# EAGLE board chapr (EAGLE 6.4)
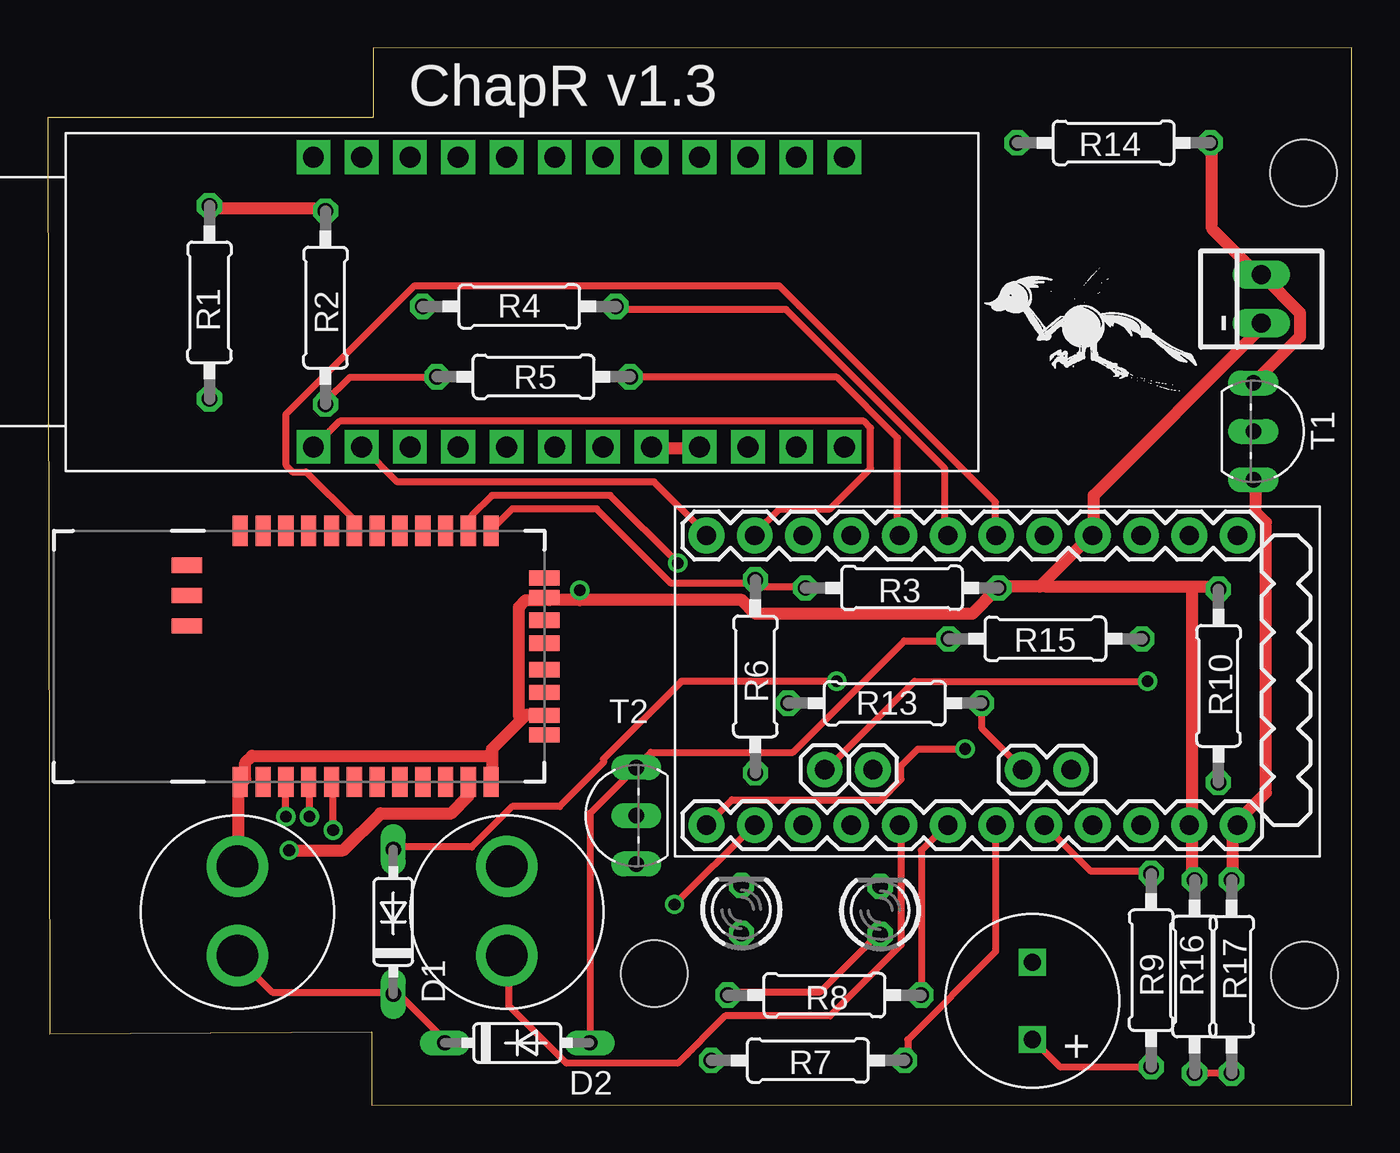
[diagram p0: board, top side]
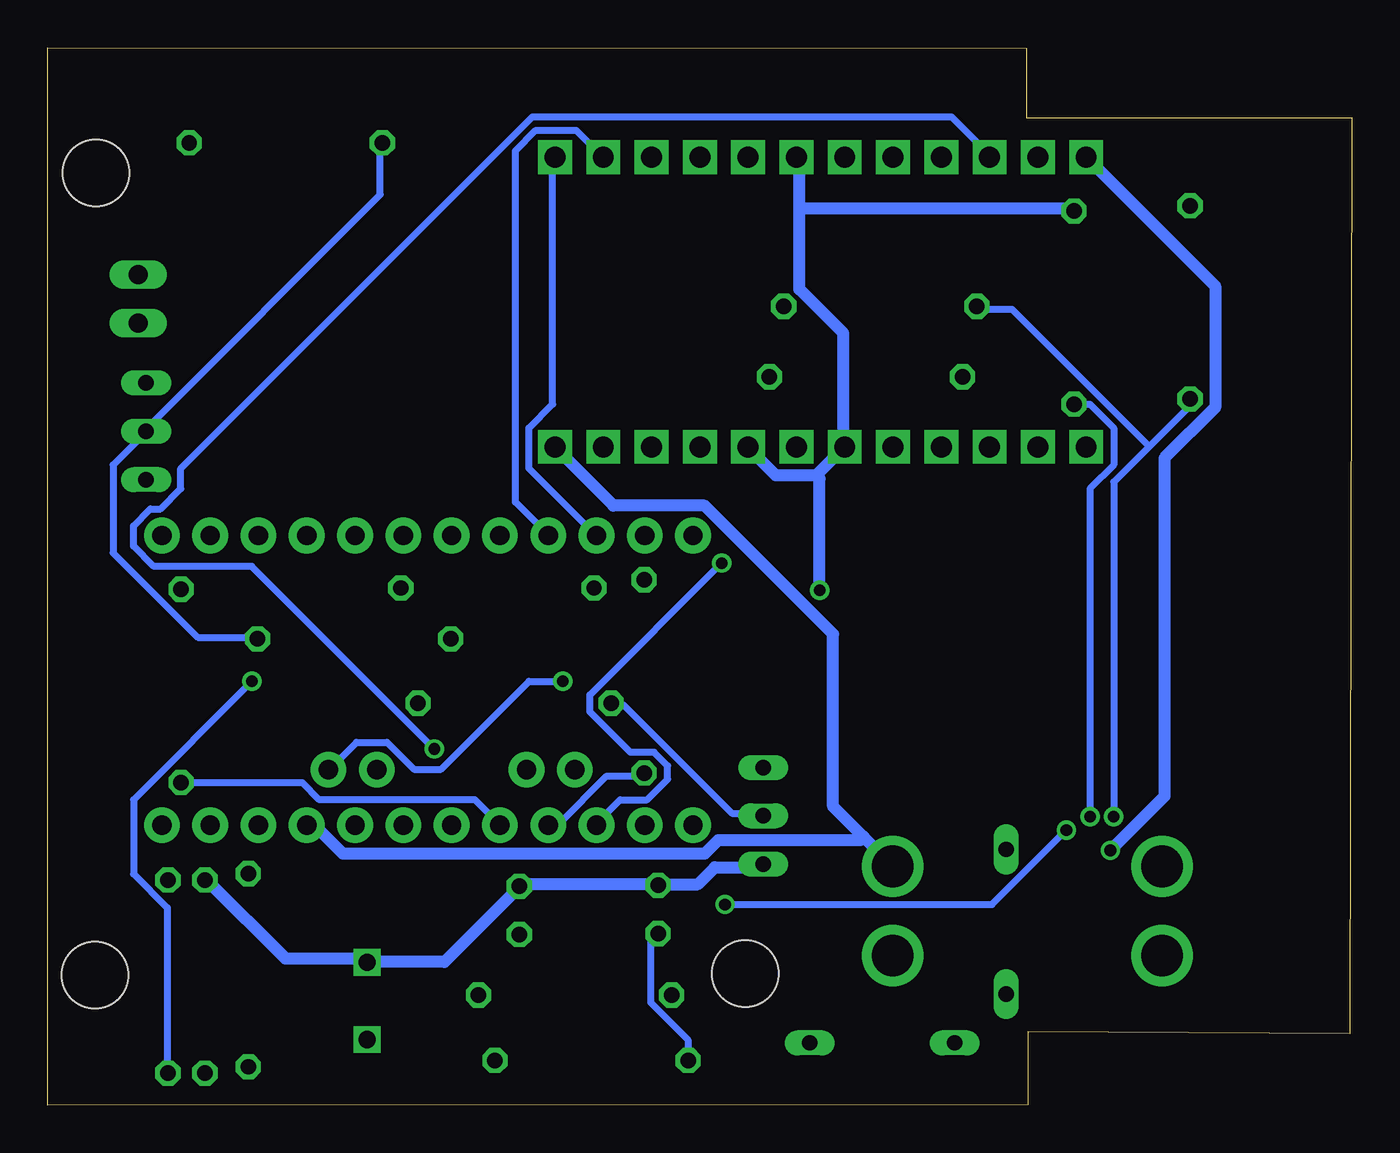
[diagram p1: board, bottom side, seen from below]

Size 68.61 x 55.65 mm. Coordinates in mm from the lower left corner, seen from the top.
Outline: 0.11,3.78 17.05,3.86 17.05,0.03 68.61,0 68.61,55.65 17.13,55.6 17.13,51.97 0,51.97 0.11,3.78
Copper layers (1*16): Top 0.035mm / dielectric 1.5mm / Bottom 0.035mm
Design rules "ChapRDesignRules": minimum track width 10mil, minimum drill 24mil, track to track 8mil, track to pad 8mil, pad to pad 8mil, via to via 9mil, smd to smd 9mil, copper to edge 40mil, drill to drill 8mil, minimum pad ring 10mil, minimum via ring 8mil, stop-mask expansion 4mil, vias tented up to drill 0mil, thermal gap 10mil
Net classes: 0 default: width 0.381 mm; 1 GND: width 0.635 mm; 2 Supply: width 0.635 mm; 3 Main Supply: width 0.635 mm
Holes 3.5 mm at 66.07,49.05 66.11,6.84 31.92,6.94
tRestrict: area 24.3,16 to 26.8,18.5; area -0.7,15.9 to 9.5,31.2; area 30,4.9 to 34,8.9; area 64.1,4.8 to 68.1,8.8; area 64.2,47.1 to 68.2,51.1; area 24.6,28.5 to 26.8,31.1
bRestrict: area 24.3,16 to 26.8,18.5; area -0.7,16 to 9.5,31.3; area 64,4.8 to 68.2,8.8; area 64.2,47.2 to 68.3,51.1; area 29.9,5 to 34,8.9
vRestrict: area 9.5,17.4 to 25.5,29.4

## Footprints (pad centres in the part's own frame; a part is rotated, then mirrored left to right if it is on the bottom)
22-23-2021 = drill 1 long: 1 -1.27,0; 2 1.27,0
PROMININOHEADER = drill 1.016 pad 1.88: A0 6.35,-5.08; A1 6.35,-2.54; A2 6.35,0; A3 6.35,2.54; A4 3.429,1.397; A5 3.429,3.937; A6 3.429,-9.017; A7 3.429,-6.477; D2 -8.89,2.54; D3 -8.89,0; D4 -8.89,-2.54; D5 -8.89,-5.08; D6 -8.89,-7.62; D7 -8.89,-10.16; D8 -8.89,-12.7; D9 -8.89,-15.24; D10 6.35,-15.24; D11 6.35,-12.7; D12 6.35,-10.16; D13 6.35,-7.62; GND -8.89,5.08; GND2 6.35,10.16; RAWV 6.35,12.7; RST -8.89,7.62; RST2 6.35,7.62; RXI -8.89,10.16; TXO -8.89,12.7; VCC 6.35,5.08
DO35-7 = drill 0.813 long: A 3.81,0; C -3.81,0
LED3MM = drill 0.813 octagon: A -1.27,0; K 1.27,0
RN41 = smd 0.8 x 1.6: 1 -6.6,-6.6; 2 -5.4,-6.6; 3 -4.2,-6.6; 4 -3,-6.6; 5 -1.8,-6.6; 6 -0.6,-6.6; 7 0.6,-6.6; 8 1.8,-6.6; 9 3,-6.6; 10 4.2,-6.6; 11 5.4,-6.6; 12 6.6,-6.6; 13 6.6,6.6; 14 5.4,6.6; 15 4.2,6.6; 16 3,6.6; 17 1.8,6.6; 18 0.6,6.6; 19 -0.6,6.6; 20 -1.8,6.6; 21 -3,6.6; 22 -4.2,6.6; 23 -5.4,6.6; 24 -6.6,6.6 | smd 1.6 x 0.8: 25 -9.4,4.8; 26 -9.4,3.2; 27 -9.4,1.6; 28 9.4,3.1; 29 9.4,-3.1; 30 9.4,-4.122; 31 9.4,-1.9; 32 9.4,-0.7; 33 9.4,0.7; 34 9.4,1.9; 35 9.4,4.122
2-PIN-PUSHBUTTON = drill 2.2 pad 3.048: P$1 -1.778,0; P$2 2.921,0
0207/10 = drill 0.813 octagon: 1 -5.08,0; 2 5.08,0
TO92-EBC = drill 0.813 long: B 0,-1.27; C 2.54,-1.27; E -2.54,-1.27
SPEAKER = drill 0.9 square: + -2.032,0; - 2.032,0
V2DIP2 = drill 1.1 pad 1.778 square: P$1 40.97,1.27; P$2 38.43,1.27; P$3 35.89,1.27; P$4 33.35,1.27; P$5 30.81,1.27; P$6 28.27,1.27; P$7 25.73,1.27; P$8 23.19,1.27; P$9 20.65,1.27; P$10 18.11,1.27; P$11 15.57,1.27; P$12 13.03,1.27; P$13 40.97,16.51; P$14 38.43,16.51; P$15 35.89,16.51; P$16 33.35,16.51; P$17 30.81,16.51; P$18 28.27,16.51; P$19 25.73,16.51; P$20 23.19,16.51; P$21 20.65,16.51; P$22 18.11,16.51; P$23 15.57,16.51; P$24 13.03,16.51

## Placement (x,y rotation side)
-  9v power  [22-23-2021]  63.84,42.42 90 top
ARDUINO  PROMININOHEADER  [PROMININOHEADER]  49.9,21.09 270 top
D1  1N4148  [DO35-7]  18.19,9.66 90 top
D2  1N4148  [DO35-7]  24.71,3.29 0 top
LED1  [LED3MM]  43.8,10.26 90 top
M2  RN42 Module  [RN41]  16.74,23.62 0 top
PB1  PUSHBUTTON  [2-PIN-PUSHBUTTON]  24.16,10.8 270 top
PB2  BUTTON  [2-PIN-PUSHBUTTON]  9.99,10.8 270 top
PWR-LED  [LED3MM]  36.5,10.31 90 top
R1  19.1k  [0207/10]  8.52,42.24 270 top
R2  19.1k  [0207/10]  14.62,41.97 270 top
R3  19.1k  [0207/10]  44.95,27.22 180 top
R4  10k  [0207/10]  24.81,42.03 0 top
R5  10k  [0207/10]  25.56,38.33 0 top
R6  10k  [0207/10]  37.23,22.57 270 top
R7  470  [0207/10]  40,2.37 0 top
R8  470  [0207/10]  40.86,5.8 0 top
R9  100  [0207/10]  58.06,7.11 90 top
R10  10k  [0207/10]  61.59,22.07 270 top
R13  10k  [0207/10]  44.05,21.16 0 top
R14  19.1k  [0207/10]  56.08,50.64 0 top
R15  1.5k  [0207/10]  52.49,24.54 180 top
R16  24K  [0207/10]  60.34,6.77 90 top
R17  24K  [0207/10]  62.28,6.77 270 top
T1  3906  [TO92-EBC]  64.7,35.46 270 top
T2  3904  [TO92-EBC]  29.7,15.24 90 top
U$2  SPEAKER  [SPEAKER]  51.8,5.5 90 top
V2DIP2  V2DIP2  [V2DIP2]  0.95,33.37 0 top

## Library data of the parts
- = con-molex; MF: MOLEX; MPN: 22-23-2021; OC_FARNELL: 1462926; OC_NEWARK: 25C3832
ARDUINO PB1 PB2 U$2 V2DIP2 = ChapR-Custom
D1 D2 = diode
LED1 PWR-LED = led
M2 = SparkFun-RF
R1-R10 R13-R17 = resistor
T1 T2 = transistor-neu-to92

## Nets
+3V3 [Supply]: M2.11 V2DIP2.P$24
+5V [Supply]: ARDUINO.VCC PB1.P$1 V2DIP2.P$1
+9V [Main Supply]: -.2 R14.2 T1.E
GND [GND]: -.1 ARDUINO.GND ARDUINO.GND2 LED1.K M2.1 M2.12 M2.28 M2.29 PB2.P$1 PWR-LED.K R1.1 R2.1 R3.1 R10.1 R16.2 T2.E U$2.- V2DIP2.P$4 V2DIP2.P$5 V2DIP2.P$7 V2DIP2.P$18
N$1: R14.1 R15.1 T1.B
N$2: ARDUINO.D10 V2DIP2.P$22
N$3: ARDUINO.D13 R6.2
N$4: ARDUINO.D12 M2.14
N$5: ARDUINO.D11 M2.5
N$6: M2.3 R1.2 R4.1
N$7: M2.4 R2.2 R5.1
N$8: ARDUINO.D5 R5.2
N$9: M2.13 R3.2 R6.1
N$10: ARDUINO.D6 V2DIP2.P$14
N$11: ARDUINO.D7 V2DIP2.P$13
N$12: ARDUINO.D8 V2DIP2.P$12
N$13: ARDUINO.D9 V2DIP2.P$11
N$14: ARDUINO.D4 R4.2
N$15: ARDUINO.D3 M2.19
N$16: PWR-LED.A R7.1
N$17: LED1.A R8.1
N$18: ARDUINO.A2 R7.2
N$19: R9.1 U$2.+
N$20: ARDUINO.A1 R8.2
N$21: ARDUINO.A3 R9.2
N$23 [Main Supply]: ARDUINO.RAWV R17.1 T1.C
N$24: ARDUINO.A0 PB1.P$2 R10.2
N$25: D2.A R15.2 T2.C
N$26: R13.1 T2.B
N$27: D1.C D2.C PB2.P$2
N$29: ARDUINO.A5 D1.A
N$30: ARDUINO.A4 R13.2
N$31: ARDUINO.A6 R16.1 R17.2

## Tracks (layer width: path | path; a pad name or v marks a point on that pad's centre or on a via)
+3V3  (via drill 0.61)
  Top 0.635: v12.71,13.42 15.55,13.42 17.51,15.37 21.24,15.37 22.13,16.26 22.13,16.97 M2.11
  Bottom 0.635: v12.71,13.42 9.87,16.26 9.87,34.04 7.2,36.71 7.2,43.11 13.95,49.86 V2DIP2.P$24
+5V
  Bottom 0.635: 25.69,14.13 24.27,12.7 PB1.P$1 | 25.69,14.13 27.29,15.73 27.29,24.79 34.05,31.55 38.85,31.55 41.87,34.57 V2DIP2.P$1 | ARDUINO.VCC 54.85,14.66 54.49,14.66 53.07,13.24 34.05,13.24 33.33,13.95 25.87,13.95 25.69,14.13
+9V
  Top 0.635: T1.E 63.56,38.13 65.87,40.44 65.87,41.69 63.92,43.64 -.2 63.56,43.82 61.25,46.13 61.25,50.58 R14.2
GND  (via drill 0.61)
  Top 0.635: R2.1 14.49,47.2 8.62,47.2 R1.1 | V2DIP2.P$4 34.22,34.57 31.91,34.57 V2DIP2.P$5 | 23.38,18.39 23.38,18.75 24.98,20.35 | 23.38,18.39 23.38,17.15 M2.12 | 24.98,20.35 25.16,20.53 26.04,20.53 M2.29 | 24.98,20.35 24.8,20.53 24.8,26.22 25.16,26.57 26.04,26.57 M2.28 26.4,26.57 28,26.57 | PB2.P$1 10.04,12.7 10.04,16.97 M2.1 10.4,17.15 10.4,18.04 10.75,18.39 23.2,18.39 23.38,18.39 | R16.2 60.18,11.99 60.18,14.66 ARDUINO.GND2 60.18,15.02 60.18,27.11 60.18,27.28 | 52.36,27.46 54.85,29.95 ARDUINO.GND 55.03,30.31 55.03,32.08 63.74,40.8 63.74,41.15 -.1 | 52.36,27.46 52.18,27.28 50.05,27.28 R3.1 49.87,27.11 48.63,25.86 37.25,25.86 36.54,26.57 28,26.57 | 60.18,27.28 52.54,27.28 52.36,27.46 | 60.18,27.28 61.43,27.28 R10.1 | v28,27.11 28,26.75 28,26.57
  Bottom 0.635: 28.18,33.15 26.76,34.57 V2DIP2.P$7 26.76,34.93 26.76,40.62 29.07,42.93 29.07,47.2 | 28.18,33.15 30.31,33.15 31.73,34.57 V2DIP2.P$5 | 29.07,47.2 29.07,49.86 V2DIP2.P$18 | R2.1 14.67,47.2 28.89,47.2 29.07,47.2 | T2.E 31.02,12.53 33.51,12.53 34.4,11.64 36.36,11.64 PWR-LED.K 36.71,11.64 43.65,11.64 LED1.K 44,11.28 47.74,7.55 51.65,7.55 U$2.- 52,7.73 56.09,7.73 60.18,11.82 R16.2 | v28,27.11 28,32.97 28.18,33.15
N$1
  Bottom 0.381: R15.1 57.69,24.62 60.72,24.62 65.16,29.06 65.16,33.68 63.56,35.29 T1.B 63.38,35.64 51.11,47.91 51.11,50.58 R14.1
N$2  (via drill 0.61)
  Top 0.381: v48.27,18.75 45.78,18.75 44.89,17.86 44.89,17.15 43.82,16.08 36,16.08 34.76,14.84 ARDUINO.D10
  Bottom 0.381: v48.27,18.75 57.87,28.35 63.03,28.35 64.09,29.42 64.09,30.48 63.21,31.37 62.67,31.37 61.6,32.44 61.6,33.51 43.11,52 21.07,52 19.11,50.04 V2DIP2.P$22
N$3
  Bottom 0.381: R6.2 37.25,17.33 39.2,17.33 41.69,14.84 42.22,14.84 ARDUINO.D13
N$4  (via drill 0.61)
  Top 0.381: v33.16,28.53 29.6,32.08 23.38,32.08 22.31,31.02 22.31,30.31 M2.14
  Bottom 0.381: v33.16,28.53 40.09,21.59 40.09,20.71 37.96,18.57 36.71,18.57 36,17.86 36,17.15 37.07,16.08 38.49,16.08 39.74,14.84 ARDUINO.D12
N$5  (via drill 0.61)
  Top 0.381: v15.02,14.48 15.02,16.97 M2.5 | v32.98,10.57 37.07,14.66 ARDUINO.D11
  Bottom 0.381: v15.02,14.48 18.93,10.57 v32.98,10.57
N$6  (via drill 0.61)
  Top 0.381: v12.53,15.19 12.53,16.97 M2.3
  Bottom 0.381: v12.53,15.19 12.53,32.8 10.67,34.66 | 10.67,34.66 8.62,36.71 8.62,37.06 R1.2 | R4.1 19.64,41.86 17.87,41.86 10.75,34.75 10.67,34.66
N$7  (via drill 0.61)
  Top 0.381: v13.78,15.19 13.78,16.97 M2.4 | R5.1 20.36,38.31 15.91,38.31 14.67,37.06 R2.2
  Bottom 0.381: v13.78,15.19 13.78,32.44 12.53,33.68 12.53,35.64 13.78,36.89 14.49,36.89 R2.2
N$8
  Top 0.381: R5.2 30.67,38.31 41.51,38.31 44.71,35.11 44.71,30.13 ARDUINO.D5
N$9
  Top 0.381: M2.13 23.38,30.31 24.44,31.37 28.89,31.37 32.8,27.46 36.89,27.46 37.07,27.64 R6.1 36.89,27.28 39.74,27.28 R3.2
N$10
  Bottom 0.381: V2DIP2.P$14 39.56,50.04 40.8,51.29 42.94,51.29 44,50.22 44,31.73 42.4,30.13 ARDUINO.D6
N$11
  Bottom 0.381: V2DIP2.P$13 42.05,49.86 42.05,36.89 43.29,35.64 43.29,33.51 39.91,30.13 ARDUINO.D7
N$12
  Top 0.381: V2DIP2.P$12 14.13,34.75 15.38,36 42.94,36 43.29,35.64 43.29,33.51 41.16,31.37 38.49,31.37 37.25,30.13 ARDUINO.D8
N$13
  Top 0.381: V2DIP2.P$11 16.62,34.57 18.4,32.8 31.91,32.8 34.58,30.13 ARDUINO.D9
N$14
  Top 0.381: R4.2 29.96,41.86 38.85,41.86 47.2,33.51 47.2,30.13 ARDUINO.D4
N$15
  Top 0.381: M2.19 16.09,30.31 16.09,30.84 13.6,33.33 12.89,33.33 12.53,33.68 12.53,36.35 19.29,43.11 38.49,43.11 49.87,31.73 49.87,30.13 ARDUINO.D3
N$16
  Bottom 0.381: R7.1 34.93,2.39 34.93,3.46 36.89,5.41 36.89,8.62 36.54,8.97 PWR-LED.A
N$17
  Top 0.381: R8.1 35.82,5.95 40.62,5.95 43.65,8.97 LED1.A
N$18
  Top 0.381: R7.2 45.25,2.39 45.25,3.46 49.87,8.08 49.87,14.66 ARDUINO.A2
N$19
  Top 0.381: R9.1 53.25,2.04 51.83,3.46 U$2.+
N$20
  Top 0.381: R8.2 45.96,5.95 45.96,13.42 47.2,14.66 ARDUINO.A1
N$21
  Top 0.381: R9.2 58.05,12.35 54.85,12.35 52.54,14.66 ARDUINO.A3
N$23
  Top 0.635: R17.1 62.32,11.99 62.32,14.48 62.49,14.66 ARDUINO.RAWV 62.67,15.02 64.09,16.44 64.09,30.66 63.56,31.2 63.56,32.8 T1.C
N$24
  Top 0.381: PB1.P$2 24.27,7.73 24.27,5.24 27.29,2.21 33.16,2.21 35.65,4.7 41.16,4.7 44.89,8.44 44.89,14.66 ARDUINO.A0
  Bottom 0.381: R10.2 61.43,16.97 55.2,16.97 54.32,16.08 46.14,16.08 44.89,14.84 ARDUINO.A0
N$25
  Top 0.381: D2.A 28.53,3.46 28.53,15.37 30.85,17.68 T2.C 31.02,17.86 31.73,18.57 39.2,18.57 45.07,24.44 47.38,24.44 R15.2
N$26
  Bottom 0.381: T2.B 31.02,15.37 32.62,15.37 38.31,21.06 38.85,21.06 R13.1
N$27
  Top 0.381: D2.C 20.89,3.46 18.58,5.77 18.22,5.77 D1.C 18.04,5.95 11.82,5.95 10.04,7.73 PB2.P$2
N$29  (via drill 0.61)
  Top 0.381: v41.51,22.31 33.33,22.31 29.25,18.22 29.25,18.04 26.93,15.73 24.44,15.73 22.31,13.59 18.22,13.59 D1.A
  Bottom 0.381: v41.51,22.31 43.29,22.31 47.91,17.68 49.34,17.68 50.76,19.11 52.36,19.11 53.78,17.68 ARDUINO.A5
N$30
  Top 0.381: R13.2 49.16,21.06 49.16,19.82 51.29,17.68 ARDUINO.A4
N$31  (via drill 0.61)
  Top 0.381: R16.1 60.36,1.68 62.14,1.68 R17.2 | v57.87,22.31 45.6,22.31 40.98,17.68 ARDUINO.A6
  Bottom 0.381: v57.87,22.31 64.09,16.08 64.09,12.17 62.32,10.39 62.32,1.86 R17.2

## Text on the board
tPlace: ChapR v1.3 | +
Reference: .26 inner support diam | .32 outer support diam | 2.4 max board width | 1.94 between outer supports edge